# Altium PCB ArtFire.PcbDoc (part 2 of 2)
Units mil, origin at the board's own origin, x right, y up, seen from the top; angles counter-clockwise.
Board outline 4250 x 3350 mil, 2 copper layers (Top Layer, Bottom Layer); 169 components, 121 nets, 545 pads, 207 vias.
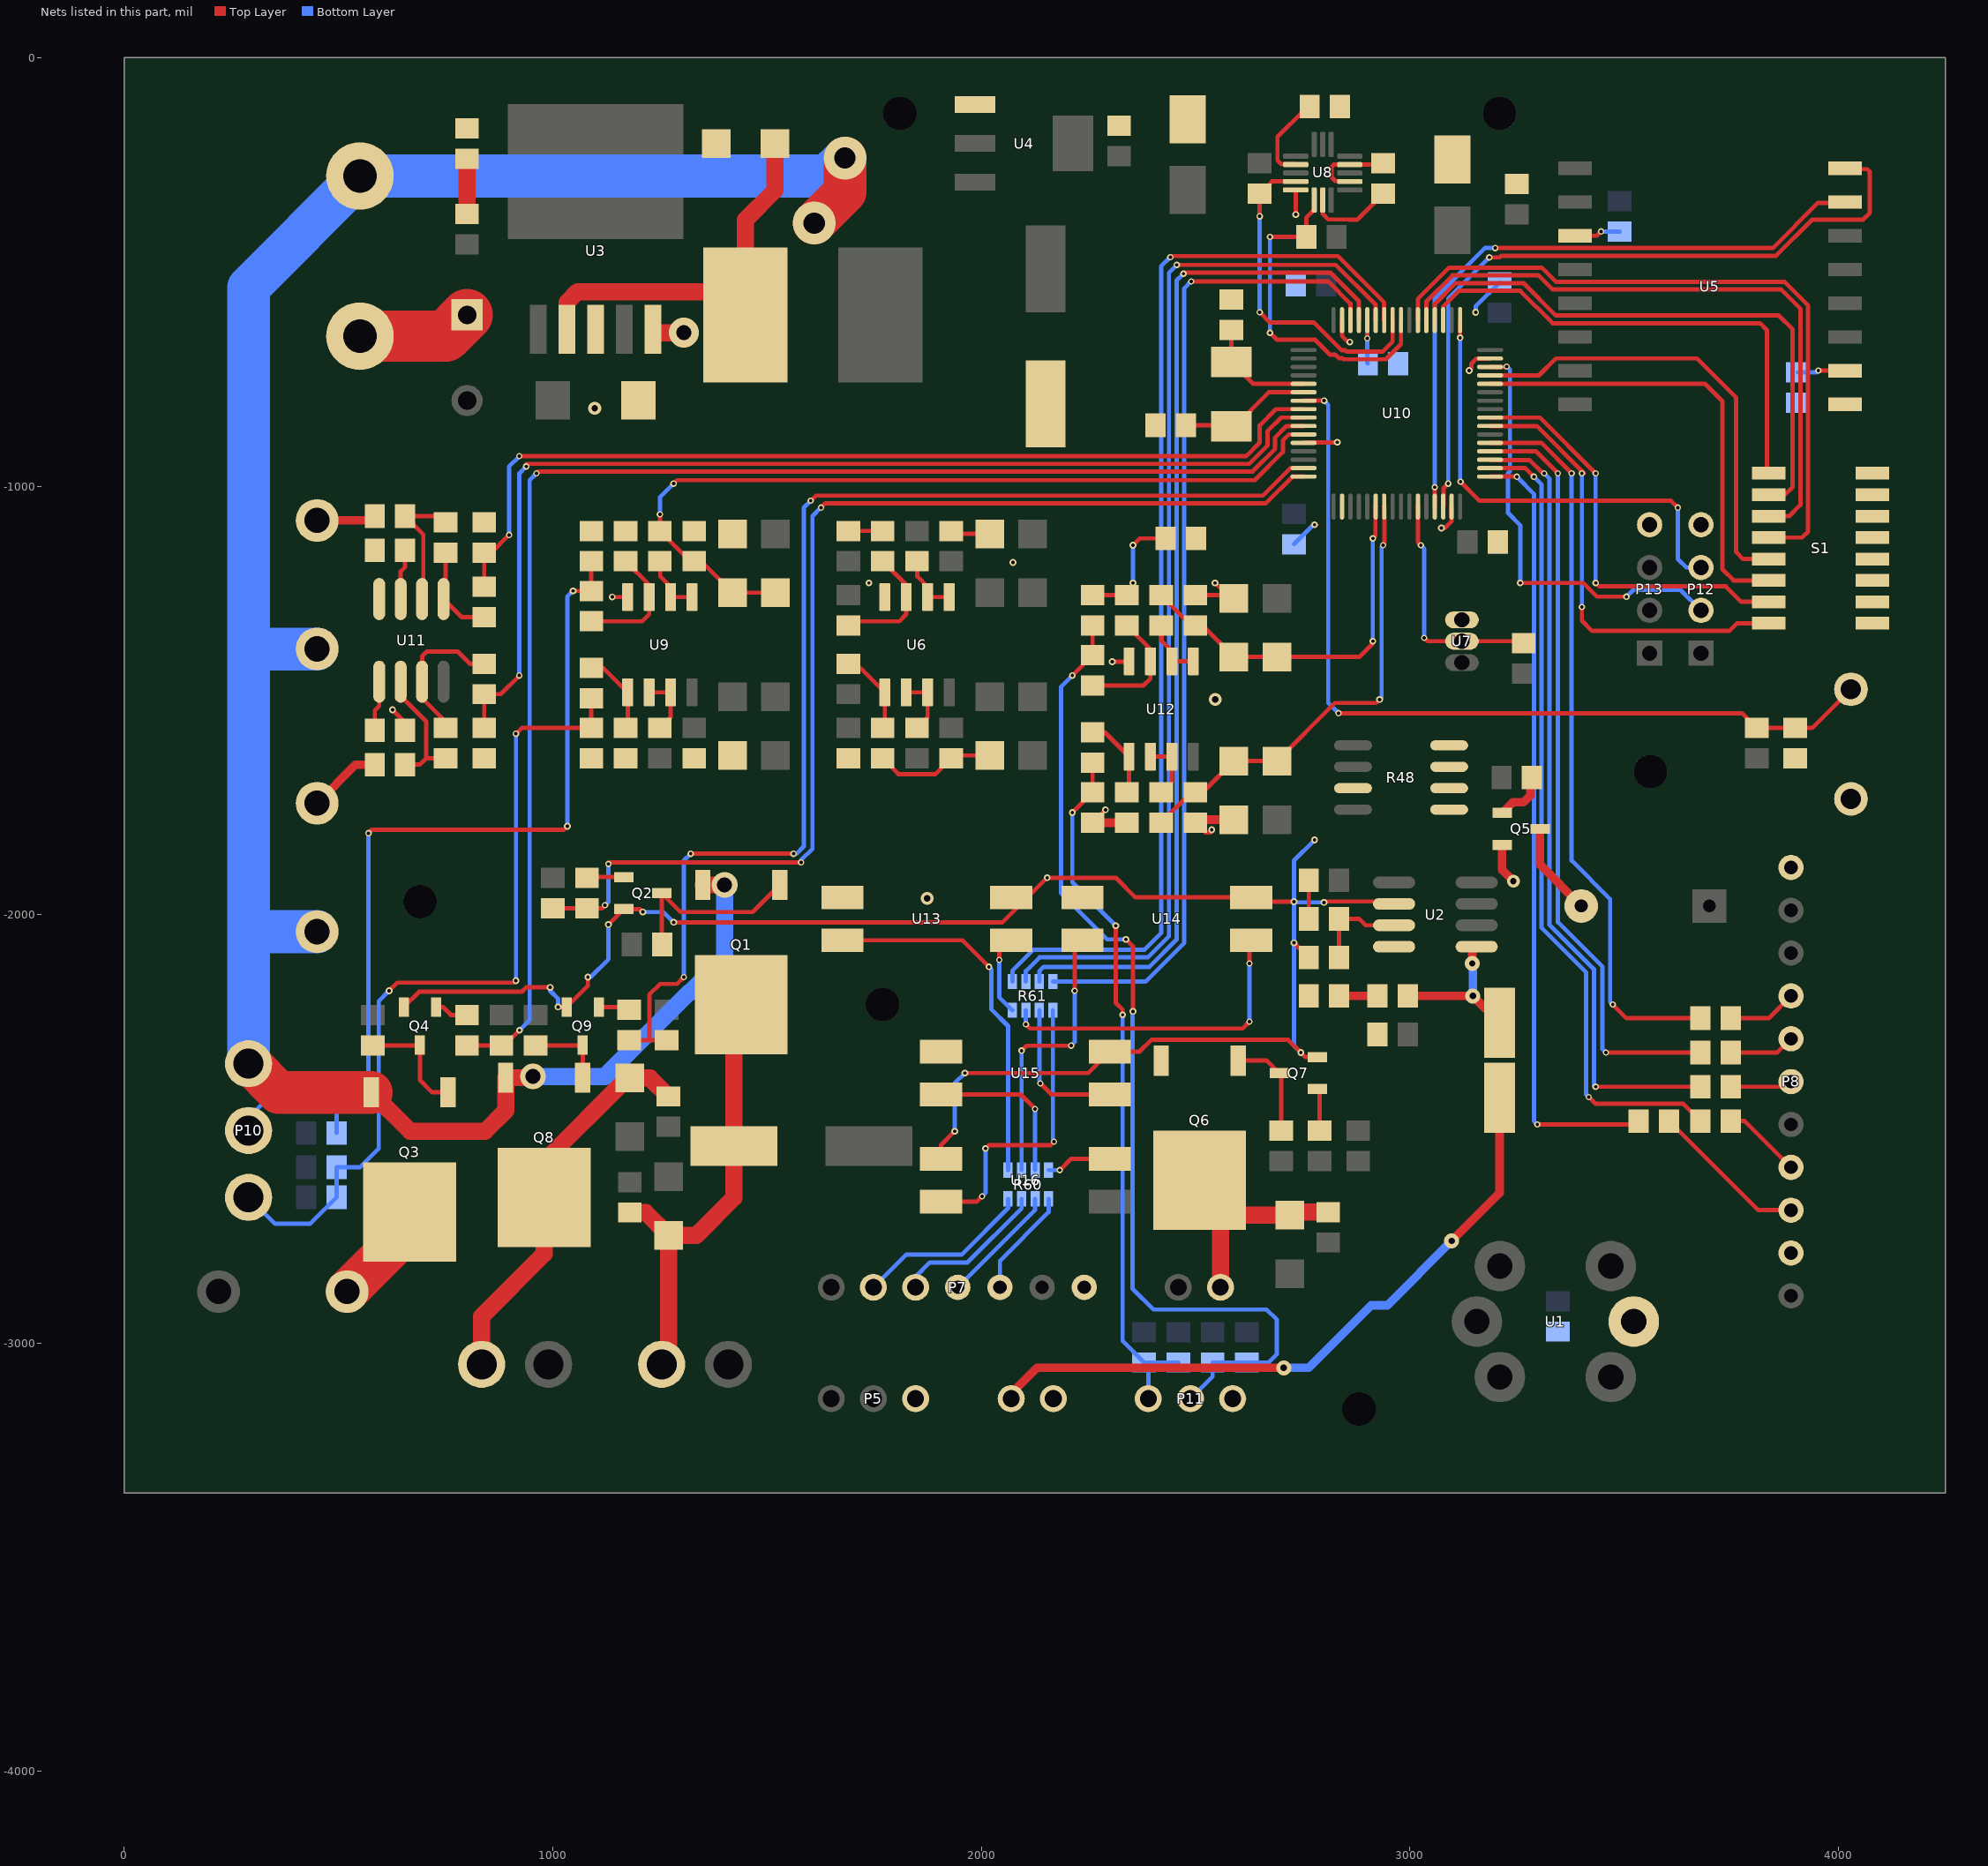
[diagram p2: the nets of this part, all layers, seen from the top]

## Via types
v1: diameter 15, hole 8, Top Layer to Bottom Layer, tented both sides, 100 vias
v2: diameter 16, hole 8, Top Layer to Bottom Layer, tented both sides, 85 vias
v3: diameter 30, hole 15, Top Layer to Bottom Layer, tented both sides, 8 vias
v4: diameter 35, hole 15, Top Layer to Bottom Layer, tented both sides, 6 vias
v5: diameter 60, hole 35, Top Layer to Bottom Layer, tented both sides, 5 vias
v6: diameter 100, hole 50, Top Layer to Bottom Layer, tented both sides, 2 vias
v7: diameter 70, hole 35, Top Layer to Bottom Layer, tented both sides, 1 vias

## Nets (pads, with @x,y where several pads share a name; then routed paths per layer and width w, separated by ;. In a path a pad name is that pad's centre, name@x,y a point inside that pad or via, vN(x,y) a via of type N, cw(c..) or ccw(c..) an arc to the next point about the centre after c; other vN are vias at no path point) (continued)
FHD_OUT: C19.1 C29.2 P10.1 R35.1 R41.2 | length 1954.2
  Top Layer w10: v2(618,-2178) 637,-2159 909,-2159 v2(914,-2154) ; v2(914,-1578) 927.43,-1564.57 C29.2@1090,-1564.57 R41.2@1090,-1495.43
  Bottom Layer w10: P10.1@290,-2660 352,-2722 433.43,-2722 C19.1@495.43,-2660 R35.1@495.43,-2590 550,-2590 594,-2546 594,-2202 v2(618,-2178) ; v2(914,-2154) v2(914,-1578)
FIRE_TEM_D: R46.1 R47.2 U10.8 | length 2247.6
  Top Layer w10: R46.1@840,-1234.57 R47.2@840,-1155.43 856.57,-1155.43 v1(898,-1114) ; v1(922,-930) 2618,-930 2650,-898 2650,-858 2687.84,-820.16 U10.8@2752.48,-820.16
  Bottom Layer w10: v1(898,-1114) 898,-954 v1(922,-930)
FIRE_TEM_T: R55.1 R56.2 U10.9 | length 2558.6
  Top Layer w10: R56.2@840,-1564.57 R55.1@840,-1485.43 878.57,-1485.43 v1(922,-1442) ; v1(938,-954) 938,-948 2625.46,-948 2668,-905.46 2668,-872 2700.16,-839.84 U10.9@2752.48,-839.84
  Bottom Layer w10: v1(922,-1442) 922,-970 v1(938,-954)
FIRE_UP: R11.1 R12.1 U10.10 | length 3305.4
  Top Layer w10: R12.1@800,-2305.43 R11.1@880,-2305.43 886.9,-2305.43 v1(922.33,-2270) ; v1(962,-970) 966,-966 2632.91,-966 2686,-912.91 2686,-886 2712.47,-859.53 U10.10@2752.48,-859.53
  Bottom Layer w10: v1(922.33,-2270) 946,-2246.33 946,-986 v1(962,-970)
FLD_IN: C23.2 D8.1 D10.2 R31.1 U10.11 | length 1987.2
  Top Layer w10: v1(1250,-1066) R31.1@1250,-1104.57 1320.87,-1175.43 C23.2@1330,-1175.43 1346.93,-1175.43 D10.2@1420,-1248.5 D8.1@1520,-1248.5 ; v1(1282,-994) 1290,-986 2638.37,-986 2704,-920.37 2704,-893.46 2718.24,-879.21 U10.11@2752.48,-879.21
  Bottom Layer w10: v1(1250,-1066) 1250,-1026 v1(1282,-994)
FLD_OUT: C18.1 C21.2 P10.2 R33.2 R34.1 | length 2221.5
  Top Layer w10: v2(570,-1810) 578,-1802 1026,-1802 v2(1034,-1794) ; v2(1047.43,-1244.57) R33.2@1090,-1244.57 C21.2@1090,-1175.43
  Bottom Layer w10: P10.2@290,-2504.09 290,-2474 394,-2370 466,-2370 495.43,-2399.43 C18.1@495.43,-2430 ; R34.1@495.43,-2510 C18.1@495.43,-2430 ; v2(570,-1810) 570,-2410 550,-2430 C18.1@495.43,-2430 ; v2(1034,-1794) 1034,-1258 v2(1047.43,-1244.57)
IO1: R61.1 U10.58 | length 2582.1
  Top Layer w10: v1(2441.5,-465.5) 2444,-463 2832.46,-463 2940.47,-571.02 U10.58@2940.47,-612.48
  Bottom Layer w10: R61.1@2072.76,-2156.54 2072.76,-2131.24 2122,-2082 2381.63,-2082 2420,-2043.63 2420,-487 v1(2441.5,-465.5)
IO2: R61.2 U10.59 | length 2505.8
  Top Layer w10: v1(2456.5,-483.5) 2827.5,-483.5 2920.79,-576.79 U10.59@2920.79,-612.48
  Bottom Layer w10: R61.2@2104.25,-2156.54 2104.25,-2131.75 2136,-2100 2389.09,-2100 2438,-2051.09 2438,-502 v1(2456.5,-483.5)
IO3: R61.3 U10.61 | length 2418.7
  Top Layer w10: v1(2472,-504) 2474.5,-501.5 2814.96,-501.5 2881.42,-567.96 U10.61@2881.42,-612.48
  Bottom Layer w10: R61.3@2135.75,-2156.54 2135.75,-2132.25 2146,-2122 2392.54,-2122 2456,-2058.54 2456,-520 v1(2472,-504)
IO4: R61.4 U10.62 | length 2326.8
  Top Layer w10: v1(2490,-522) 2810,-522 2861.73,-573.73 U10.62@2861.73,-612.48
  Bottom Layer w10: R61.4@2167.24,-2156.54 2383.46,-2156.54 2474,-2066 2474,-538 v1(2490,-522)
LDHD_IN: C42.2 D16.1 D17.2 R58.1 U10.23 | length 1084.6
  Top Layer w10: R58.1@2420,-1785.43 2490.87,-1714.57 C42.2@2500,-1714.57 2516.93,-1714.57 D17.2@2590,-1641.5 D16.1@2690,-1641.5 2825.5,-1506 2922,-1506 v2(2930,-1498) ; v1(2938,-1138) 2941.29,-1134.71 2941.29,-1048.33 U10.23@2940.47,-1047.52
  Bottom Layer w10: v2(2930,-1498) 2934.5,-1493.5 2934.5,-1141.5 v1(2938,-1138)
LDHD_OUT: C28.1 C40.2 P11.1 R39.1 R59.2 | length 1657.7
  Top Layer w10: v2(2212.57,-1762) C40.2@2260,-1714.57 R59.2@2260,-1645.43 ; v2(2314,-2026) 2314,-2206 2330,-2222 v2(2330,-2234)
  Bottom Layer w10: v2(2212.57,-1762) 2212.57,-1924.57 v2(2314,-2026) ; v2(2330,-2234) 2330,-2995.43 C28.1@2380,-3045.43 ; P11.1@2390,-3130 2390,-3055.43 C28.1@2380,-3045.43 ; R39.1@2460,-3045.43 C28.1@2380,-3045.43
LDLD_IN: C36.2 D14.1 D15.2 R49.1 U10.22 | length 889.3
  Top Layer w10: R49.1@2420,-1254.57 2490.87,-1325.43 C36.2@2500,-1325.43 2516.93,-1325.43 D15.2@2590,-1398.5 D14.1@2690,-1398.5 2883.07,-1398.5 2914,-1367.57 v1(2914,-1362) ; v1(2914,-1122) 2919.92,-1116.08 2919.92,-1048.39 U10.22@2920.79,-1047.52
  Bottom Layer w10: v1(2914,-1362) v1(2914,-1122)
LDLD_OUT: C27.1 C34.2 P11.2 R38.1 R50.2 | length 2385
  Top Layer w10: v2(2212.57,-1442) R50.2@2260,-1394.57 C34.2@2260,-1325.43 ; v2(2338,-2058) 2354,-2074 v2(2354,-2226)
  Bottom Layer w10: v2(2212.57,-1442) 2186,-1468.57 2186,-1949.7 2294.3,-2058 v2(2338,-2058) ; v2(2354,-2226) 2353,-2227 2353,-2873 2402,-2922 2666,-2922 2690,-2946 2690,-3026 2670.57,-3045.43 R38.1@2620,-3045.43 C27.1@2540,-3045.43 2540,-3078.43 P11.2@2488.43,-3130
MMA_SCL: R29.1 U8.4 U10.57 | length 780.6
  Top Layer w10: v1(2650,-594) 2674,-618 2776.95,-618 2841.95,-683 2850.15,-683 2853.15,-686 2936.8,-686 2960.16,-662.64 U10.57@2960.16,-612.48 ; v1(2650,-370) R29.1@2650,-317.43 2678.69,-288.74 U8.4@2734.06,-288.74
  Bottom Layer w10: v1(2650,-594) v1(2650,-370)
MMA_SDA: R30.1 U8.6 U10.56 | length 804.5
  Top Layer w10: v1(2674,-642) 2690,-658 2779.05,-658 2814.45,-693.4 2826.89,-693.4 2834.49,-701 2842.7,-701 2845.7,-704 2944.25,-704 2979.84,-668.41 U10.56@2979.84,-612.48 ; v1(2674,-418) R30.1@2758.57,-418 2758.57,-373.43 2777.37,-354.63 U8.6@2777.37,-332.05
  Bottom Layer w10: v1(2674,-642) v1(2674,-418)
NetC1_2: C1.2 R2.2 | length 90
  Top Layer w10: R2.2@2764.57,-2010 C1.2@2764.57,-1920
NetC3_1: C3.1 C6.2 U2.5 | length 348.8
  Top Layer w20: C6.2@2995.43,-2190 v4(3147.6,-2190) C3.1@3210,-2252.4 ; v4(3146,-2114) U2.5@3146,-2085.46
  Bottom Layer w20: v4(3146,-2114) 3147.6,-2112.4 v4(3147.6,-2190)
NetC3_2: C3.2 P3.1 | length 1568.3
  Top Layer w20: P3.1@2070,-3130 2070,-3118 2130,-3058 v4(2706,-3058) ; v4(3098,-2762) 3210,-2650 C3.2@3210,-2427.6
  Bottom Layer w20: v4(2706,-3058) 2764.26,-3058 2910.26,-2912 2948,-2912 v4(3098,-2762)
NetC4_2: C4.2 C5.2 D1.1 P2.2 Q1.2 | length 1067
  Top Layer w40: C5.2@1180,-2695.43 1216.93,-2695.43 D1.1@1270,-2748.5 ; P2.2@1254.09,-3050 1270,-3034.09 D1.1@1270,-2748.5 ; Q1.2@1440,-2210.39 1422.52,-2227.87 C4.2@1422.52,-2540 1422.52,-2661.48 1335.5,-2748.5 D1.1@1270,-2748.5
NetC6_1: C6.1 R9.2 | length 89.1
  Top Layer w20: R9.2@2835.43,-2190 C6.1@2924.57,-2190
NetC9_2: C9.2 D3.1 P6.2 Q6.2 | length 469.2
  Top Layer w40: P6.2@2558.43,-2870 2558.43,-2668.82 2591.1,-2701.5 D3.1@2720,-2701.5 2726.93,-2694.57 C9.2@2810,-2694.57
NetC12_2: C12.2 D5.1 P9.2 Q8.2 | length 922.8
  Top Layer w40: P9.2@834.09,-3050 834.09,-2937.91 980,-2792 Q8.2@980,-2660.39 980,-2576 1174.5,-2381.5 D5.1@1180,-2381.5 1226.93,-2381.5 C12.2@1270,-2424.57
NetC16_2: C16.2 R27.1 U6.3 | length 288.2
  Top Layer w10: R27.1@1690,-1315.43 1808.57,-1315.43 1825,-1299 U6.3@1825,-1258.78 1825,-1230.43 C16.2@1770,-1175.43
NetC20_2: C20.2 U8.2 | length 202.9
  Top Layer w10: U8.2@2734.06,-249.37 2734.06,-248.59 2700.88,-248.59 2691.54,-239.25 2691.54,-184.46 2754,-122 C20.2@2766.57,-122
NetC22_2: C22.2 R33.1 U9.3 | length 288.2
  Top Layer w10: R33.1@1090,-1315.43 1208.57,-1315.43 1225,-1299 U9.3@1225,-1258.78 1225,-1230.43 C22.2@1170,-1175.43
NetC25_2: C25.2 R36.1 U6.5 | length 186.8
  Top Layer w10: R36.1@1690,-1424.57 1718.35,-1424.57 U6.5@1775,-1481.22 C25.2@1775,-1559.57
NetC30_2: C30.2 R41.1 U9.5 | length 186.8
  Top Layer w10: R41.1@1090,-1424.57 1118.35,-1424.57 U9.5@1175,-1481.22 C30.2@1175,-1559.57
NetC32_1: C32.1 U10.5 Y1.2 | length 264.4
  Top Layer w10: C32.1@2584,-635.43 Y1.2@2584,-710.39 2634.71,-761.1 U10.5@2752.48,-761.1
NetC33_1: C33.1 U10.6 Y1.1 | length 305.9
  Top Layer w10: C33.1@2477.43,-858 Y1.1@2582,-858 ; Y1.1@2584,-860 2592,-860 2671.21,-780.79 U10.6@2752.48,-780.79
NetC35_2: C35.2 R50.1 U12.3 | length 288.2
  Top Layer w10: R50.1@2260,-1465.43 2378.57,-1465.43 2395,-1449 U12.3@2395,-1408.78 2395,-1380.43 C35.2@2340,-1325.43
NetC39_2: C39.2 R57.2 S2.2 U10.7 | length 2039.2
  Top Layer w10: U10.7@2752.48,-800.47 v1(2800.47,-800.47) ; v1(2834,-1530) 3775.43,-1530 R57.2@3810,-1564.57 C39.2@3900,-1564.57 3939.53,-1564.57 S2.2@4030,-1474.09
  Bottom Layer w10: v1(2800.47,-800.47) 2810,-810 2810,-1506 v1(2834,-1530)
NetC41_2: C41.2 R59.1 U12.5 | length 186.8
  Top Layer w10: R59.1@2260,-1574.57 2288.35,-1574.57 U12.5@2345,-1631.22 C41.2@2345,-1709.57
NetCB1_1: CB1.1 P1.1 | length 270.7
  Top Layer w120: P1.1@550,-650 750,-650 CB1.1@800,-600
NetD2_1: D2.1 R4.1 | length 129.1
  Top Layer w40: R4.1@800,-364.57 D2.1@800,-235.43
NetD4_2: D4.2 L1.1 U3.2 | length 941.3
  Top Layer w40: U3.2@1033.07,-634.25 1033.07,-570.93 1058,-546 1396,-546 L1.1@1450,-600 1450,-378 1518.5,-309.5 D4.2@1518.5,-200
NetLS1_2: LS1.2 Q5.3 | length 219.8
  Top Layer w20: Q5.3@3304.29,-1800 3304.29,-1883.9 LS1.2@3400.39,-1980
NetP4_2: P4.2 Q3.2 | length 246.1
  Top Layer w100: P4.2@520,-2880 666,-2734 Q3.2@666,-2694.39
NetP7_2: P7.2 R60.8 | length 412.6
  Bottom Layer w10: P7.2@1748.43,-2870 1824.43,-2794 1954,-2794 2062.76,-2685.24 R60.8@2062.76,-2663.46
NetP7_3: P7.3 R60.7 | length 360.6
  Bottom Layer w10: P7.3@1846.85,-2870 1846.85,-2845.15 1880,-2812 1968,-2812 2094.25,-2685.75 R60.7@2094.25,-2663.46
NetP7_4: P7.4 R60.6 | length 281.3
  Bottom Layer w10: P7.4@1945.28,-2870 2125.75,-2689.53 R60.6@2125.75,-2663.46
NetP7_5: P7.5 R60.5 | length 253.6
  Bottom Layer w10: P7.5@2043.7,-2870 2043.7,-2808.3 2157.24,-2694.76 R60.5@2157.24,-2663.46
NetP8_3: P8.3 R62.1 | length 370.7
  Top Layer w10: R62.1@3605.43,-2482 3813.43,-2690 P8.3@3890,-2690
NetP8_4: P8.4 R18.1 | length 185.3
  Top Layer w10: R18.1@3749.43,-2482 3782,-2482 P8.4@3890,-2590
NetP8_6: P8.6 R20.1 | length 145.5
  Top Layer w10: R20.1@3749.43,-2402 3878,-2402 P8.6@3890,-2390
NetP8_7: P8.7 R21.1 | length 153.8
  Top Layer w10: R21.1@3749.43,-2322 3858,-2322 P8.7@3890,-2290
NetP8_8: P8.8 R23.1 | length 162.1
  Top Layer w10: R23.1@3749.43,-2242 3838,-2242 P8.8@3890,-2190
NetP14_1: P14.1 R44.1 | length 138.7
  Top Layer w20: P14.1@450,-1080 574.57,-1080 R44.1@584.57,-1070
NetP15_1: P15.1 R52.1 | length 171.8
  Top Layer w20: P15.1@450,-1740 540,-1650 R52.1@584.57,-1650
NetQ1_1: Q1.1 Q2.3 R1.2 | length 438.7
  Top Layer w10: R1.2@1254.29,-2068.86 Q2.3@1254.29,-1950 1298.29,-1994 1466.63,-1994 Q1.1@1529.76,-1930.87
NetQ2_1: Q2.1 R7.2 | length 83.7
  Top Layer w10: R7.2@1081.97,-1912.6 Q2.1@1165.71,-1912.6
NetQ3_1: Q3.1 Q4.3 R10.2 | length 269.9
  Top Layer w10: R10.2@580,-2305.43 688.86,-2305.43 Q4.3@690,-2304.29 690,-2386 718.87,-2414.87 Q3.1@755.76,-2414.87
NetQ4_1: Q4.1 R12.2 | length 80.4
  Top Layer w10: Q4.1@727.4,-2215.71 743.71,-2215.71 762.57,-2234.57 R12.2@800,-2234.57
NetQ5_1: Q5.1 R14.1 | length 126.5
  Top Layer w20: Q5.1@3215.71,-1762.6 3240.31,-1738 3266,-1738 3282,-1722 3282,-1683.43 R14.1@3285.43,-1680
NetQ6_1: Q6.1 Q7.3 R13.2 | length 244.4
  Top Layer w10: Q6.1@2599.76,-2340.87 2666.57,-2340.87 Q7.3@2695.71,-2370 2700,-2374.29 R13.2@2700,-2504.57
NetQ7_1: Q7.1 R16.2 | length 91.5
  Top Layer w10: R16.2@2790,-2504.57 Q7.1@2790,-2413.11
NetQ8_1: Q8.1 Q9.3 R17.2 | length 187.1
  Top Layer w10: R17.2@960,-2305.43 1068.86,-2305.43 Q9.3@1070,-2304.29 1070,-2380.63 Q8.1@1069.76,-2380.87
NetQ9_1: Q9.1 R22.2 | length 73.4
  Top Layer w10: Q9.1@1107.4,-2215.71 1171.14,-2215.71 R22.2@1178,-2222.57
NetR2_1: R2.1 R8.2 U2.3 | length 224.3
  Top Layer w10: R8.2@2835.43,-2100 R2.1@2835.43,-2010 2882,-2010 2897,-2025 U2.3@2963.54,-2025
NetR24_1: R24.1 U5.3 | length 108.2
  Top Layer w10: U5.3@3386,-415.48 3436.52,-415.48 v1(3446.57,-405.43)
  Bottom Layer w10: v1(3446.57,-405.43) R24.1@3490,-405.43
NetR26_2: R26.2 U6.1 U6.2 | length 149.5
  Top Layer w10: R26.2@1850,-1175.43 1850.8,-1176.23 1850.8,-1210.8 1875,-1235 U6.2@1875,-1258.78 U6.1@1925,-1258.78 U6.1@1930.78,-1258.78
NetR28_1: R28.1 U5.10 | length 112
  Top Layer w10: v1(3954,-730) 4015.48,-730 U5.10@4015.92,-730.44
  Bottom Layer w10: R28.1@3906,-734.57 3949.43,-734.57 v1(3954,-730)
NetR31_2: R31.2 U9.1 U9.2 | length 149.5
  Top Layer w10: R31.2@1250,-1175.43 1250.8,-1176.23 1250.8,-1210.8 1275,-1235 U9.2@1275,-1258.78 U9.1@1325,-1258.78 U9.1@1330.78,-1258.78
NetR32_2: R32.2 U6.6 U6.7 | length 143.7
  Top Layer w10: U6.6@1825,-1481.22 U6.7@1875,-1481.22 1875,-1539.57 R32.2@1850,-1564.57
NetR37_2: R37.2 U8.7 | length 204.1
  Top Layer w10: U8.7@2797.06,-332.05 2797.06,-364.5 2810,-377.44 2858.44,-377.44 2859,-378 2877.43,-378 R37.2@2938,-317.43
NetR40_2: R40.2 U9.6 U9.7 | length 143.7
  Top Layer w10: U9.6@1225,-1481.22 U9.7@1275,-1481.22 1275,-1539.57 R40.2@1250,-1564.57
NetR42_1: R42.1 R44.2 U11.2 | length 313
  Top Layer w10: U11.2@695,-1263.54 698,-1260.54 698,-1112.57 R44.2@655.43,-1070 735.43,-1070 R42.1@750,-1084.57
NetR42_2: R42.2 R46.2 U11.1 | length 222.5
  Top Layer w10: R42.2@750,-1155.43 750,-1258.54 U11.1@745,-1263.54 786.89,-1305.43 R46.2@840,-1305.43
NetR45_2: R45.2 U11.3 | length 117.9
  Top Layer w10: U11.3@645,-1263.54 645,-1199 655.43,-1188.57 R45.2@655.43,-1150
NetR49_2: R49.2 U12.1 U12.2 | length 149.5
  Top Layer w10: R49.2@2420,-1325.43 2420.8,-1326.23 2420.8,-1360.8 2445,-1385 U12.2@2445,-1408.78 U12.1@2495,-1408.78 U12.1@2500.78,-1408.78
NetR51_1: R51.1 R52.2 U11.6 | length 304.3
  Top Layer w10: U11.6@645,-1456.46 645,-1490 704.57,-1549.57 704.57,-1635.43 ; R52.2@655.43,-1650 690,-1650 704.57,-1635.43 ; R51.1@750,-1635.43 704.57,-1635.43
NetR51_2: R51.2 R55.2 U11.7 | length 351.7
  Top Layer w10: R51.2@750,-1564.57 750,-1550 695,-1495 U11.7@695,-1456.46 695,-1397 706,-1386 778,-1386 806.57,-1414.57 R55.2@840,-1414.57
NetR53_2: R53.2 U11.5 | length 117.9
  Top Layer w10: R53.2@584.57,-1570 584.57,-1523.43 595,-1513 U11.5@595,-1456.46
NetR54_2: R54.2 U10.60 | length 102.1
  Top Layer w10: v1(2901.1,-654.9) U10.60@2901.1,-612.48
  Bottom Layer w10: v1(2901.1,-654.9) 2901.1,-712.54 R54.2@2902.57,-714
NetR58_2: R58.2 U12.6 U12.7 | length 143.7
  Top Layer w10: U12.6@2395,-1631.22 U12.7@2445,-1631.22 2445,-1689.57 R58.2@2420,-1714.57
NetR60_1: R60.1 U13.4 | length 860.5
  Top Layer w10: U13.4@1676.3,-2060 1956,-2060 v1(2018,-2122)
  Bottom Layer w10: v1(2018,-2122) 2024,-2128 2024,-2221.64 2062.76,-2260.39 R60.1@2062.76,-2596.54
NetR60_2: R60.2 U14.4 | length 656.3
  Top Layer w10: v1(2094.25,-2317.75) 2106,-2306 v1(2210,-2306) ; v1(2218,-2178) 2218,-2078.3 U14.4@2236.3,-2060
  Bottom Layer w10: R60.2@2094.25,-2596.54 v1(2094.25,-2317.75) ; v1(2210,-2306) 2218,-2298 v1(2218,-2178)
NetR60_3: R60.3 U15.4 | length 376.2
  Top Layer w10: U15.4@1906.3,-2420 2092,-2420 v1(2125.75,-2453.75)
  Bottom Layer w10: R60.3@2125.75,-2596.54 v1(2125.75,-2453.75)
NetR60_4: R60.4 U16.2 | length 153.7
  Top Layer w10: v1(2183.46,-2596.54) 2210,-2570 U16.2@2300,-2570
  Bottom Layer w10: R60.4@2157.24,-2596.54 v1(2183.46,-2596.54)
NetR61_5: R61.5 U16.4 | length 690.3
  Top Layer w10: U16.4@1906.3,-2670 1990,-2670 v1(2002,-2658) ; v1(2010,-2546) 2018,-2538 2162,-2538 v1(2170,-2530)
  Bottom Layer w10: v1(2002,-2658) 2010,-2650 v1(2010,-2546) ; R61.5@2167.24,-2223.46 2167.24,-2527.24 v1(2170,-2530)
NetR61_6: R61.6 U15.1 | length 344.2
  Top Layer w10: v1(2138,-2394) 2164,-2420 U15.1@2300,-2420
  Bottom Layer w10: R61.6@2135.75,-2223.46 2135.75,-2391.75 v1(2138,-2394)
NetR61_7: R61.7 U14.1 | length 756.9
  Top Layer w10: v1(2104.25,-2256.25) 2114,-2266 2610,-2266 v1(2626,-2250) ; v1(2626,-2114) 2626,-2064 U14.1@2630,-2060
  Bottom Layer w10: v1(2104.25,-2256.25) R61.7@2104.25,-2223.46 ; v1(2626,-2250) v1(2626,-2114)
NetR61_8: R61.8 U13.1 | length 187.8
  Top Layer w10: v1(2042,-2106) 2042,-2088 U13.1@2070,-2060
  Bottom Layer w10: v1(2042,-2106) 2042,-2192.71 R61.8@2072.76,-2223.46
PGND: C2.2 C7.2 C8.2 C15.1 C16.1 C17.1 C21.1 C22.1 C23.1 C24.1 C25.1 C26.1 C29.1 C30.1 C31.1 C34.1 C35.1 C36.1 C40.1 C41.1 C42.1 D2.2 D4.1 D7.1 D10.1 D11.1 D13.1 D15.1 D17.1 P1.2 P3.2 P5.3 P7.7 P8.2 P8.11 P10.3 P11.3 P14.2 P15.2 Q1.3 Q3.3 Q5.2 Q6.3 Q8.3 R3.1 R5.2 R9.1 R45.1 R47.1 R53.1 R56.1 U1.5 U2.4 U3.3 U3.5 U6.4 U9.4 U11.4 U12.4 U13.3 U14.3 U15.3 | length 6821.9
  Top Layer w10: v2(626,-1522) 655.43,-1551.43 R53.1@655.43,-1570 ; v2(1138.78,-1258.78) U9.4@1175,-1258.78 ; C15.1@1690,-1104.57 C16.1@1770,-1104.57 ; C25.1@1770,-1635.43 1806.62,-1672.06 1893.38,-1672.06 C26.1@1930,-1635.43 1936.93,-1628.5 D11.1@2020,-1628.5 ; C17.1@1936.93,-1111.5 D7.1@2020,-1111.5 ; C40.1@2260,-1785.43 v2(2290,-1755.43) ; C34.1@2260,-1254.57 C35.1@2340,-1254.57 ; v2(2306,-1410) U12.4@2343.78,-1410 ; v2(2354,-1138) 2370,-1122 R3.1@2430.57,-1122 ; C42.1@2500,-1785.43 2522.57,-1808 2535.68,-1808 2538,-1805.68 v2(2538,-1802) ; C36.1@2500,-1254.57 D15.1@2574.57,-1254.57 ; v2(2546,-1226) D15.1@2574.57,-1254.57 ; D15.1@2590,-1261.5 2581.5,-1261.5 D15.1@2574.57,-1254.57
  Top Layer w20: C40.1@2260,-1785.43 C41.1@2340,-1785.43 ; C42.1@2506.93,-1778.5 D17.1@2590,-1778.5 ; Q5.2@3215.71,-1837.4 3215.71,-1895.71 v3(3242,-1922)
  Top Layer w40: Q3.3@576.24,-2414.87 667.37,-2506 842,-2506 890.24,-2457.76 Q8.3@890.24,-2380.87 951.13,-2380.87 v5(954,-2378) ; U3.5@1241.61,-642 v7(1306,-642) ; Q1.3@1350.24,-1930.87 v5(1401.13,-1930.87)
  Top Layer w100: P10.3@290,-2348.19 293.9,-2348.19 360.58,-2414.87 Q3.3@576.24,-2414.87 ; v6(1610,-386) 1682,-314 v6(1682,-234)
  Bottom Layer w10: v2(2354,-1226) v2(2354,-1138)
  Bottom Layer w40: v5(954,-2378) 1122,-2378 1318.5,-2181.5 1320.7,-2181.5 1401.13,-2101.07 v5(1401.13,-1930.87)
  Bottom Layer w100: P10.3@290,-2348.19 290,-1370 ; 296,-2040 P15.2@450,-2040 ; P14.2@450,-1380 300,-1380 290,-1370 ; v6(1682,-234) 1640.02,-275.98 P1.2@550,-275.98 290,-535.98 290,-1370
  other v2: 1738,-1226 2074,-1178
  other v3: 1874,-1962 2546,-1498 1098,-818
PUMP1: R19.1 R22.1 U10.15 | length 2854.4
  Top Layer w10: R22.1@1178,-2293.43 1222.57,-2293.43 ; R19.1@1266,-2293.43 1222.57,-2293.43 ; v1(1306,-2146) 1290,-2162 1250.56,-2162 1225.44,-2187.12 1225.44,-2290.56 1222.57,-2293.43 ; v1(1322,-1858) v1(1562,-1858) ; v1(1602,-1034) 1614,-1022 2657.18,-1022 2721.23,-957.95 U10.15@2752.48,-957.95
  Bottom Layer w10: v1(1306,-2146) 1306,-1874 v1(1322,-1858) ; v1(1562,-1858) 1569,-1858 1586,-1841 1586,-1050 v1(1602,-1034)
PUMP2: R6.1 R7.1 U10.16 | length 2679.6
  Top Layer w10: R6.1@1000,-1985.43 R7.1@1080,-1985.43 1114.57,-1985.43 v1(1122,-1978) ; v1(1130,-1882) 1133.5,-1878.5 v1(1579.49,-1878.5) ; v1(1626,-1050) 1636,-1040 2664.64,-1040 2727,-977.64 U10.16@2752.48,-977.64
  Bottom Layer w10: v1(1122,-1978) 1130,-1970 v1(1130,-1882) ; v1(1579.49,-1878.5) 1579.49,-1872.96 1606,-1846.46 1606,-1070 v1(1626,-1050)
SGND: C10.2 C11.2 C13.2 C14.2 C20.1 C32.2 C33.2 C37.2 C38.2 C39.1 C43.2 C44.2 P12.4 P13.4 Q2.2 Q4.2 Q7.2 Q9.2 R3.2 R8.1 R28.2 R37.1 R43.1 R48.1 R48.2 R48.3 R48.4 R48.7 R54.1 S1.9 S1.10 S1.11 S1.12 S1.13 S1.14 S1.15 S1.16 S2.1 U2.2 U4.1 U5.9 U7.1 U8.5 U8.10 U8.12 U10.12 U10.18 U10.31 U10.47 U10.63 U13.2 U14.2 U15.2 U16.3 | length 4960.8
  Top Layer w10: Q4.2@652.6,-2215.71 688.31,-2180 928,-2180 938,-2170 v2(994,-2170) ; v2(1012.29,-2215.71) Q9.2@1032.6,-2215.71 1082,-2166.31 v2(1082,-2146) ; v2(1130,-2023.11) Q2.2@1165.71,-1987.4 1203.4,-1987.4 v2(1210,-1994) ; v2(1282,-2018) 2050,-2018 v2(2154,-1914) 2314,-1914 2360,-1960 U14.2@2630,-1960 2640,-1970 v2(2730,-1970) ; U16.3@1906.3,-2570 1906.3,-2537.7 v2(1938,-2506) ; v2(1962,-2370) 2250,-2370 U15.2@2300,-2320 2369.57,-2320 2397.13,-2292.43 2716.43,-2292.43 v2(2746,-2322) 2756.6,-2332.6 Q7.2@2784.29,-2332.6 ; v2(2730,-2066) 2764,-2100 R8.1@2764.57,-2100 ; v2(2734.06,-365.94) U8.5@2734.06,-308.43 ; U10.12@2752.48,-898.9 2753.3,-898.08 2830.5,-898.08 v2(2831,-897.58) ; v2(2778,-1090) v2@2782.5,-1090 ; v2(2800,-1971.62) 2802.18,-1969.44 2963.54,-1969.44 U2.2@2963.54,-1975 ; U10.63@2842.05,-612.48 2842.05,-649.44 2856.18,-663.57 v2(2860.43,-663.57) ; U8.10@2860.05,-288.74 2859.27,-287.96 2826.86,-287.96 2817.52,-278.62 2817.52,-254.51 2822.66,-249.37 U8.12@2860.05,-249.37 R37.1@2935.2,-249.37 ; v2(3074,-1098) 3082,-1098 3097.95,-1082.05 U10.31@3097.95,-1047.52 ; v2(3138.64,-730) 3144.01,-724.63 3144.01,-714.31 3156.27,-702.05 U10.47@3187.52,-702.05
  Bottom Layer w10: v2(994,-2170) 994,-2178 1012.29,-2196.29 v2(1012.29,-2215.71) ; v2(1082,-2146) 1088,-2146 1130,-2104 v2(1130,-2023.11) ; v2(1210,-1994) 1258,-1994 v2(1282,-2018) ; v2(1938,-2506) 1938,-2394 v2(1962,-2370) ; C37.2@2730,-1135.43 2775.43,-1090 v2(2778,-1090) ; v2(2746,-2322) 2730,-2306 v2(2730,-2066) v2(2730,-1970) ; v2(2778,-1826) 2730,-1874 v2(2730,-1970) ; v2(2800,-1971.62) 2731.62,-1971.62 v2(2730,-1970) ; v2(3074,-1098) 3076.05,-1095.95 v2@3079.94,-1095.95 ; v2(3154,-594) 3154,-580.57 C44.2@3210,-524.57
SR_D0: R20.2 U10.35 | length 1865.9
  Top Layer w10: U10.35@3187.52,-938.27 3188.75,-939.5 3280.49,-939.5 3310.99,-970 v1(3314,-970) ; v1(3434,-2402) R20.2@3678.57,-2402
  Bottom Layer w10: v1(3314,-970) 3326,-982 3326,-2023.55 3430,-2127.55 3430,-2398 v1(3434,-2402)
SR_D1: R21.2 U10.36 | length 1798.7
  Top Layer w10: U10.36@3187.52,-918.58 3294.58,-918.58 v1(3346,-970) ; v1(3458,-2322) R21.2@3678.57,-2322
  Bottom Layer w10: v1(3346,-970) 3346,-2018.1 3450,-2122.1 3450,-2314 v1(3458,-2322)
SR_D2: R23.2 U10.37 | length 1717.5
  Top Layer w10: U10.37@3187.52,-898.9 3306.9,-898.9 v1(3378,-970) ; v1(3474,-2210) 3506,-2242 R23.2@3678.57,-2242
  Bottom Layer w10: v1(3378,-970) 3378,-1874 3468,-1964 3468,-2204 v1(3474,-2210)
SR_LED: R62.2 U10.33 | length 1834.4
  Top Layer w10: U10.33@3187.52,-977.64 3249.64,-977.64 v1(3250,-978) ; v1(3298,-2490) 3526.57,-2490 R62.2@3534.57,-2482
  Bottom Layer w10: v1(3250,-978) 3290,-1018 3290,-2482 v1(3298,-2490)
SR_SW: R18.2 U10.34 | length 1896.2
  Top Layer w10: U10.34@3187.52,-957.95 3187.52,-957.5 3269.5,-957.5 v1(3290,-978) ; v1(3418,-2426) 3433.44,-2441.44 3638.01,-2441.44 R18.2@3678.57,-2482
  Bottom Layer w10: v1(3290,-978) 3308,-996 3308,-2031.01 3412,-2135.01 3412,-2420 v1(3418,-2426)
SW1: S1.1 U10.51 | length 1176.7
  Top Layer w10: U10.51@3078.27,-612.48 3078.27,-580.52 3114.79,-544 3258.08,-544 3333.79,-619.71 3818,-619.71 3834,-635.71 3834,-966.13 S1.1@3837.87,-970
SW2: S1.2 U10.52 | length 1369.7
  Top Layer w10: U10.52@3058.58,-612.48 3058.58,-574.75 3107.34,-526 3265.54,-526 3341.25,-601.71 3861.71,-601.71 3894,-634 3894,-1002 3876,-1020 S1.2@3837.87,-1020
SW3: S1.3 U10.53 | length 1517.4
  Top Layer w10: U10.53@3038.9,-612.48 3038.9,-568.98 3099.88,-508 3300.82,-508 3333.79,-540.97 3867.51,-540.97 3912,-585.46 3912,-1044 3886,-1070 S1.3@3837.87,-1070
SW4: S1.4 U10.54 | length 1652.8
  Top Layer w10: U10.54@3019.21,-612.48 3019.21,-563.21 3092.43,-490 3308.28,-490 3341.25,-522.97 3874.97,-522.97 3930,-578 3930,-1106 3916,-1120 S1.4@3837.87,-1120
SW5: S1.5 U10.45 | length 1072
  Top Layer w10: U10.45@3187.52,-741.42 3301.52,-741.42 3341.25,-701.69 3670.31,-701.69 3762,-793.39 3762,-1154 3778,-1170 S1.5@3837.87,-1170
SW6: S1.6 U10.44 | length 1070.1
  Top Layer w10: U10.44@3187.52,-761.1 3689.1,-761.1 3730,-802 3730,-1194 3756,-1220 S1.6@3837.87,-1220
SW7: S1.7 U10.40 | length 978.5
  Top Layer w10: U10.40@3187.52,-839.84 3303.84,-839.84 v1(3434,-970) ; v1(3434,-1226) 3442,-1234 3738,-1234 3774,-1270 S1.7@3837.87,-1270
  Bottom Layer w10: v1(3434,-1226) v1(3434,-970)
SW8: S1.8 U10.39 | length 1067.5
  Top Layer w10: U10.39@3187.52,-859.53 3296.52,-859.53 3406.99,-970 v1(3402,-970) ; v1(3402,-1282) 3402,-1314 3426,-1338 3746,-1338 3764,-1320 S1.8@3837.87,-1320
  Bottom Layer w10: v1(3402,-1282) v1(3402,-970)
SWCLK: P12.3 U10.49 | length 1092.8
  Top Layer w10: v1(3117.64,-653.64) U10.49@3117.64,-612.48 ; v1(3118.86,-989.64) 3163.22,-1034 3610,-1034 v1(3626,-1050)
  Bottom Layer w10: v1(3117.64,-653.64) 3117.64,-989.64 v1(3118.86,-989.64) ; v1(3626,-1050) 3626,-1170 3646,-1190 P12.3@3680,-1190
SWDIO: P12.2 U10.46 | length 1023.3
  Top Layer w10: U10.46@3187.52,-721.73 3225.45,-721.73 v1(3226.27,-720.92) ; v1(3258,-1226) 3405.01,-1226 3437.01,-1258 v1(3506,-1258)
  Bottom Layer w10: v1(3226.27,-720.92) 3227.08,-720.92 3234,-727.83 3234,-965.01 3229.5,-969.51 3229.5,-1062.5 3258,-1091 v1(3258,-1226) ; v1(3506,-1258) 3522,-1242 3632,-1242 P12.2@3680,-1290
TEM: R25.1 U7.2 U10.27 | length 527.4
  Top Layer w10: U10.27@3019.21,-1047.52 3019.21,-1131.21 v1(3026,-1138) ; v1(3034,-1354) 3042,-1362 3106,-1362 R25.1@3245.43,-1362
  Bottom Layer w10: v1(3026,-1138) 3034,-1146 v1(3034,-1354)
WIFI_RX: U5.15 U10.29 | length 1539.7
  Top Layer w10: U10.29@3058.58,-1047.52 v1(3058.58,-1002.58) ; v1(3199.77,-444.23) 3847.77,-444.23 3953.26,-338.74 U5.15@4019.92,-338.74
  Bottom Layer w10: v1(3058.58,-1002.58) 3058.58,-561.42 3175.77,-444.23 v1(3199.77,-444.23)
WIFI_TX: U5.16 U10.30 | length 1709.8
  Top Layer w10: U10.30@3078.27,-1047.52 3079.08,-1046.7 3079.08,-1004.92 v1(3090,-994) ; v1(3186,-466) 3210,-466 3213.77,-462.23 3855.23,-462.23 3939.46,-378 4058.1,-378 4074,-362.1 4074,-266 4068,-260 U5.16@4019.92,-260
  Bottom Layer w10: v1(3090,-994) 3090,-562 v1(3186,-466)
pads on no net: P7.6 P8.1 P8.5 P8.9 U1.3 U1.4 U2.1 U2.7 U2.8 U3.6 U4.2 U5.2 U5.4 U5.5 U5.6 U5.7 U5.11 U5.12 U5.13 U5.14 U8.3 U8.8 U8.9 U8.11 U8.13 U8.15 U8.16 U10.1 U10.2 U10.3 U10.4 U10.41 U10.50 U10.55

## Polygon pours and split planes (outlines as drawn)
SGND on Top Layer "TSGND" (solid, remove dead copper, pour order 6): 1900,-100 1900,-400 2350,-400 2350,-1150 2750,-1150 2750,-1850 4150,-1850 4150,-100
PGND on Top Layer "TPGND" (solid, remove dead copper, pour order 8): 1850,-100 750,-100 750,-900 550,-900 550,-2800 1550,-2800 1550,-3150 3950,-3150 4150,-3150 4150,-1900 2700,-1900 2700,-1200 2300,-1200 2300,-450 1850,-450
SGND on Bottom Layer "BSGND" (solid, remove dead copper, pour order 5): 1900,-100 1900,-400 2350,-400 2350,-1150 2750,-1150 2750,-1850 4150,-1850 4150,-100
PGND on Bottom Layer "BPGND" (solid, remove dead copper, pour order 7): 1850,-100 750,-100 750,-900 550,-900 550,-2800 1550,-2800 1550,-3150 3950,-3150 4150,-3150 4150,-1900 2700,-1900 2700,-1200 2300,-1200 2300,-450 1850,-450

## Keep-outs
Keep-Out Layer:
  the board outline again, w6

## Silkscreen, mask and mechanical layers (free items; w line width, h text height)
Top Overlay:
  lines w6: 554,-1770 554,-1546 ; 564,-1032 672,-1032 690,-1050 690,-1170 ; 2652,-1830.01 2652,-1920 2654,-1922 2722,-1922 2722,-2034 ; 2746,-2474 2902,-2474 2828,-2400 3010.98,-2400
  text "RX" at 3410,-1210 h60
  text "TX" at 3410,-1310 h60
  text "3.3V" at 3740,-1440 h60
Bottom Overlay:
  text "ArtFire" at 4170,-3140 h200
  text "V0.6" at 4170,-3300 h200

## Dimensions
3562,-1666 to 4250,0 on Top Overlay
3562,-1666 to 4250,0 on Top Overlay
3210,-130 to 4250,0 on Top Overlay
3210,-130 to 4250,0 on Top Overlay
0,0 to 1810,-130 on Top Overlay
1810,-130 to 0,0 on Top Overlay
690,-1970 to 0,-3350 on Top Overlay
690,-1970 to 0,-3350 on Top Overlay
1770,-2210 to 0,-3350 on Top Overlay
1770,-2210 to 0,-3350 on Top Overlay
2882,-3154 to 4250,-3350 on Top Overlay
2882,-3154 to 4250,-3350 on Top Overlay
4250,0 to 4250,-3350 on Top Overlay
0,0 to 4250,0 on Top Overlay

## Text inside footprints (layer, text, board x,y; h text height)
P8: Top Overlay "ANT" at 3840,-3590 h196.85 r270
S1: Top Overlay "8" at 3800.47,-1355.83 h39.37 r270; Top Overlay "1" at 3800.47,-920 h39.37 r270; Top Overlay "ON" at 4091.81,-899.13 h39.37 r270